# Altium PCB PCB.PcbDoc
Units mil, origin at the board's own origin, x right, y up, seen from the top; angles counter-clockwise.
Board outline 11290 x 5470 mil, 2 copper layers (Top Layer, Bottom Layer); 60 components, 74 nets, 174 pads, 0 vias.
Unrouted connection lines stored in the file: 63.
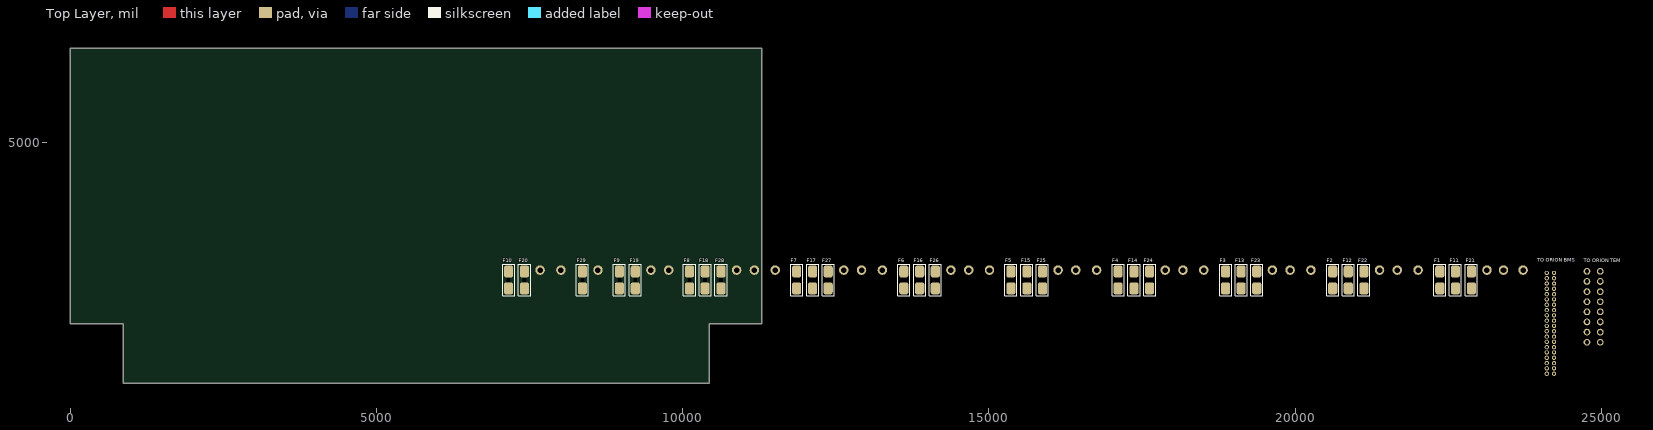
[diagram p0: Top Layer view]
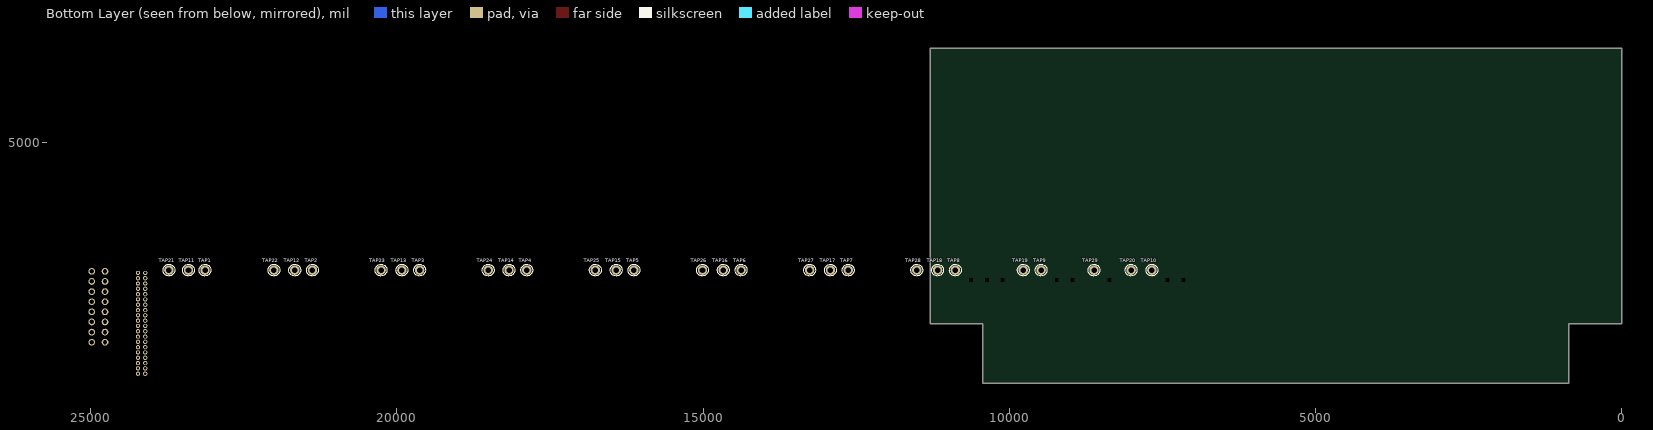
[diagram p1: Bottom Layer view, seen from below]

## Layer stack, top to bottom
Top Solder: solder mask 0.4, Solder Resist, Dk 3.5
Top Layer: signal copper 1.4
Dielectric 1: dielectric 12.6, FR-4, Dk 4.8
Bottom Layer: signal copper 1.4
Bottom Solder: solder mask 0.4, Solder Resist, Dk 3.5

## Board outline
0,2035 860,2035 860,1060 10430,1060 10430,2035 11290,2035 11290,6530 0,6530

## Design rules (kind name [scope] priority, off if disabled: settings)
Clearance [All] p1: gap=10 ignorepadtopadclearanceinfootprint=FALSE except(0: Arc-Hole Track-Hole SMDPad-Hole THPad-Hole Via-Hole Fill-Hole Poly-Hole Region-Hole Text-Hole)
PolygonConnect [All] p1: connectstyle=Relief reliefconductorwidth=10 reliefentries=4 polygonreliefangle="90 Angle" airgapwidth=10
RoutingVias [All] p1: holewidth=28 width=50 viastyle="Through Hole" minholewidth=28 minwidth=50 maxholewidth=28 maxwidth=50
SolderMaskExpansion [All] p1: expansion=4
Width [All] p1: maxlimit=10 minlimit=10 preferedwidth=10
30 further rules are at their usual default settings.

## Components (designator, comment, footprint, x,y, rotation, side; value= is the part's Value field where it differs from the comment)
F1 "0154.750DR" "Omni BLOK 0154" 22365,2750 r90 top
F2 "0154.750DR" "Omni BLOK 0154" 20615,2750 r90 top
F3 "0154.750DR" "Omni BLOK 0154" 18865,2750 r90 top
F4 "0154.750DR" "Omni BLOK 0154" 17110,2750 r90 top
F5 "0154.750DR" "Omni BLOK 0154" 15360,2750 r90 top
F6 "0154.750DR" "Omni BLOK 0154" 13610,2750 r90 top
F7 "0154.750DR" "Omni BLOK 0154" 11860,2750 r90 top
F8 "0154.750DR" "Omni BLOK 0154" 10110,2750 r90 top
F9 "0154.750DR" "Omni BLOK 0154" 8965,2750 r90 top
F10 "0154.750DR" "Omni BLOK 0154" 7155,2750 r90 top
F11 "0154.750DR" "Omni BLOK 0154" 22620,2750 r90 top
F12 "0154.750DR" "Omni BLOK 0154" 20870,2750 r90 top
F13 "0154.750DR" "Omni BLOK 0154" 19120,2750 r90 top
F14 "0154.750DR" "Omni BLOK 0154" 17370,2750 r90 top
F15 "0154.750DR" "Omni BLOK 0154" 15620,2750 r90 top
F16 "0154.750DR" "Omni BLOK 0154" 13870,2750 r90 top
F17 "0154.750DR" "Omni BLOK 0154" 12120,2750 r90 top
F18 "0154.750DR" "Omni BLOK 0154" 10365,2750 r90 top
F19 "0154.750DR" "Omni BLOK 0154" 9225,2750 r90 top
F20 "0154.750DR" "Omni BLOK 0154" 7415,2750 r90 top
F21 "0154.750DR" "Omni BLOK 0154" 22880,2750 r90 top
F22 "0154.750DR" "Omni BLOK 0154" 21125,2750 r90 top
F23 "0154.750DR" "Omni BLOK 0154" 19375,2750 r90 top
F24 "0154.750DR" "Omni BLOK 0154" 17625,2750 r90 top
F25 "0154.750DR" "Omni BLOK 0154" 15875,2750 r90 top
F26 "0154.750DR" "Omni BLOK 0154" 14125,2750 r90 top
F27 "0154.750DR" "Omni BLOK 0154" 12375,2750 r90 top
F28 "0154.750DR" "Omni BLOK 0154" 10625,2750 r90 top
F29 "0154.750DR" "Omni BLOK 0154" 8360,2750 r90 top
TAP1 "0850-0-15-20-83-14-11-0" 0850-0-15-20-83-14-11-0 23135,2910 r180 bottom
TAP2 "0850-0-15-20-83-14-11-0" 0850-0-15-20-83-14-11-0 21380,2910 r180 bottom
TAP3 "0850-0-15-20-83-14-11-0" 0850-0-15-20-83-14-11-0 19630,2910 r180 bottom
TAP4 "0850-0-15-20-83-14-11-0" 0850-0-15-20-83-14-11-0 17880,2910 r180 bottom
TAP5 "0850-0-15-20-83-14-11-0" 0850-0-15-20-83-14-11-0 16130,2910 r180 bottom
TAP6 "0850-0-15-20-83-14-11-0" 0850-0-15-20-83-14-11-0 14380,2910 r180 bottom
TAP7 "0850-0-15-20-83-14-11-0" 0850-0-15-20-83-14-11-0 12630,2910 r180 bottom
TAP8 "0850-0-15-20-83-14-11-0" 0850-0-15-20-83-14-11-0 10880,2910 r180 bottom
TAP9 "0850-0-15-20-83-14-11-0" 0850-0-15-20-83-14-11-0 9480,2910 r180 bottom
TAP10 "0850-0-15-20-83-14-11-0" 0850-0-15-20-83-14-11-0 7670,2910 r180 bottom
TAP11 "0850-0-15-20-83-14-11-0" 0850-0-15-20-83-14-11-0 23405,2910 r180 bottom
TAP12 "0850-0-15-20-83-14-11-0" 0850-0-15-20-83-14-11-0 21670,2910 r180 bottom
TAP13 "0850-0-15-20-83-14-11-0" 0850-0-15-20-83-14-11-0 19920,2910 r180 bottom
TAP14 "0850-0-15-20-83-14-11-0" 0850-0-15-20-83-14-11-0 18170,2910 r180 bottom
TAP15 "0850-0-15-20-83-14-11-0" 0850-0-15-20-83-14-11-0 16420,2910 r180 bottom
TAP16 "0850-0-15-20-83-14-11-0" 0850-0-15-20-83-14-11-0 14670,2910 r180 bottom
TAP17 "0850-0-15-20-83-14-11-0" 0850-0-15-20-83-14-11-0 12920,2910 r180 bottom
TAP18 "0850-0-15-20-83-14-11-0" 0850-0-15-20-83-14-11-0 11170,2910 r180 bottom
TAP19 "0850-0-15-20-83-14-11-0" 0850-0-15-20-83-14-11-0 9770,2910 r180 bottom
TAP20 "0850-0-15-20-83-14-11-0" 0850-0-15-20-83-14-11-0 8010,2910 r180 bottom
TAP21 "0850-0-15-20-83-14-11-0" 0850-0-15-20-83-14-11-0 23725,2910 r180 bottom
TAP22 "0850-0-15-20-83-14-11-0" 0850-0-15-20-83-14-11-0 22010,2910 r180 bottom
TAP23 "0850-0-15-20-83-14-11-0" 0850-0-15-20-83-14-11-0 20260,2910 r180 bottom
TAP24 "0850-0-15-20-83-14-11-0" 0850-0-15-20-83-14-11-0 18510,2910 r180 bottom
TAP25 "0850-0-15-20-83-14-11-0" 0850-0-15-20-83-14-11-0 16760,2910 r180 bottom
TAP26 "0850-0-15-20-83-14-11-0" 0850-0-15-20-83-14-11-0 15010,2910 r180 bottom
TAP27 "0850-0-15-20-83-14-11-0" 0850-0-15-20-83-14-11-0 13260,2910 r180 bottom
TAP28 "0850-0-15-20-83-14-11-0" 0850-0-15-20-83-14-11-0 11510,2910 r180 bottom
TAP29 "0850-0-15-20-83-14-11-0" 0850-0-15-20-83-14-11-0 8615,2910 r180 bottom
"TO ORION BMS" "1376113-6" 1376113-6 24230,2085 r90 top
"TO ORION TEM" "39300160" 39300160 24985,2890 r90 top

## Footprints (in the part's own frame and the unit in brackets; to place one, negate y for a bottom-side part, rotate by r counter-clockwise, add the part's x,y. Pads: shape width x height; smd on the part's side, far side on the other; paste and mask are expansions set on the pad)
0850-0-15-20-83-14-11-0 [mil]
  round 155 hole 90: 1(0,0)
  silkscreen extent -96,-96 96,96, body extent -77,-76 76,76, height 237
1376113-6 [mil]
  round 70 hole 40: 6(-866.14,118.11) 7(-779.53,118.11) 8(-692.91,118.11) 9(-606.3,118.11) 10(-519.68,118.11) 11(-433.07,118.11) 12(-346.46,118.11) 13(-259.84,118.11) 14(-173.23,118.11) 15(-86.61,118.11) 16(0,118.11) 17(86.61,118.11) 18(173.23,118.11) 19(259.84,118.11) 20(346.46,118.11) 21(433.07,118.11) 22(519.68,118.11) 23(606.3,118.11) 24(692.91,118.11) 25(779.53,118.11) 26(779.53,0) 27(692.91,0) 28(606.3,0) 29(519.68,0) 30(433.07,0) 31(346.46,0) 32(259.84,0) 33(173.23,0) 34(86.61,0) 35(0,0) 36(-86.61,0) 37(-173.23,0) 38(-259.84,0) 39(-346.46,0) 40(-433.07,0) 41(-519.68,0) 42(-606.3,0) 43(-692.91,0) 44(-779.53,0) 45(-866.14,0)
  body extent -1015,-321 930,281, height 787
39300160 [mm]
  round 2.8 hole 1.85: 1(0,0) 2(0,5.5) 3(-4.2,0) 4(-4.2,5.5) 5(-8.4,0) 6(-8.4,5.5) 7(-12.6,0) 8(-12.6,5.5) 9(-16.8,0) 10(-16.8,5.5) 11(-21,0) 12(-21,5.5) 13(-25.2,0) 14(-25.2,5.5) 15(-29.4,0) 16(-29.4,5.5)
  round 1.524 hole 3.05: ""(-29.4,-7.3) ""(0,-7.3)
  body extent -32.1,-13.9 3.1,6.03, height 11.4
"Omni BLOK 0154" [mm]
  rrect50% 5x3.81 smd: 1(3.5,0) 2(-3.5,0)
  rect 0x0 hole 1.4 square unplated: 3(0,0)
  silkscreen extent -6.5,-2.5 6.5,2.5, body extent -4.93,-2.52 4.9,2.51, height 3.81

## Part data
F1 F2 F3 F4 F5 F6 F7 F8 F9 F10 F11 F12 F13 F14 F15 F16 F17 F18 F19 F20 F21 F22 F23 F24 F25 F26 F27 F28 F29: "FUSE BOARD MNT 750MA 125VAC/VDC", Digikey Part Number=F1221CT-ND, Manufacturer="LittelFuse Inc", Digikey Link=https://www.digikey.com/product-detail/en/littelfuse-inc/0154.750DR/F1221CT-ND/183370, Part Number=0154.750DR
TAP1 TAP2 TAP3 TAP4 TAP5 TAP6 TAP7 TAP8 TAP9 TAP10 TAP11 TAP12 TAP13 TAP14 TAP15 TAP16 TAP17 TAP18 TAP19 TAP20 TAP21 TAP22 TAP23 TAP24 TAP25 TAP26 TAP27 TAP28 TAP29: Digikey Part Number=ED90436-ND, Angle=90, Contact=Gold, Digikey Link=https://www.digikey.com.au/products/en?keywords=0850-0-15-20-83-14-11-0, Flange=NA, Part Number=0850-0-15-20-83-14-11-0, Pitch=NA, Positions=1, Row Spacing=NA
"TO ORION BMS": Digikey Part Number=A122206-ND, Angle=0, Contact=gold, Digikey Link=https://www.digikey.com.au/product-detail/en/te-connectivity-amp-connectors/1376113-2/A122206-ND/2273530, Part Number=1376113-6, Pitch=2.2, Positions=40, Row Spacing=3
"TO ORION TEM": Digikey Part Number=WM21358-ND, Angle=90, Contact=Tin, Flange=No, Part Number=39300160, Pitch=4.2mm, Positions=16, Row Spacing=5.5mm

## Nets (pads, with @x,y where several pads share a name; then routed paths per layer and width w, separated by ;. In a path a pad name is that pad's centre, name@x,y a point inside that pad or via, vN(x,y) a via of type N, cw(c..) or ccw(c..) an arc to the next point about the centre after c; other vN are vias at no path point)
1: F1.2
2: F2.2
3: F3.2
4: F4.2
5: F5.2
6: "TO ORION BMS.6" F6.2
7: "TO ORION BMS.7" F7.2
8: "TO ORION BMS.8" F8.2
9: "TO ORION BMS.9" F9.2
10: "TO ORION BMS.10" F10.2
11: "TO ORION BMS.11" "TO ORION BMS.12" "TO ORION BMS.13" "TO ORION BMS.14" F11.2
12: "TO ORION BMS.15" F12.2
13: "TO ORION BMS.16" F13.2
14: "TO ORION BMS.17" F14.2
15: "TO ORION BMS.18" F15.2
16: "TO ORION BMS.19" F16.2
17: "TO ORION BMS.20" F17.2
18: "TO ORION BMS.21" F18.2
19: "TO ORION BMS.22" F19.2
20: "TO ORION BMS.23" F20.2
21: "TO ORION BMS.24" "TO ORION BMS.25" "TO ORION BMS.26" "TO ORION BMS.28" F21.2
22: "TO ORION BMS.29" F22.2
23: "TO ORION BMS.30" F23.2
24: "TO ORION BMS.31" F24.2
25: "TO ORION BMS.32" F25.2
26: "TO ORION BMS.33" F26.2
27: "TO ORION BMS.34" F27.2
28: "TO ORION BMS.35" F28.2
29: "TO ORION BMS.36" "TO ORION BMS.37" "TO ORION BMS.38" "TO ORION BMS.39" "TO ORION BMS.40" F29.2
NetF1_1: F1.1 TAP1.1
NetF2_1: F2.1 TAP2.1
NetF3_1: F3.1 TAP3.1
NetF4_1: F4.1 TAP4.1
NetF5_1: F5.1 TAP5.1
NetF6_1: F6.1 TAP6.1
NetF7_1: F7.1 TAP7.1
NetF8_1: F8.1 TAP8.1
NetF9_1: F9.1 TAP9.1
NetF10_1: F10.1 TAP10.1
NetF11_1: F11.1 TAP11.1
NetF12_1: F12.1 TAP12.1
NetF13_1: F13.1 TAP13.1
NetF14_1: F14.1 TAP14.1
NetF15_1: F15.1 TAP15.1
NetF16_1: F16.1 TAP16.1
NetF17_1: F17.1 TAP17.1
NetF18_1: F18.1 TAP18.1
NetF19_1: F19.1 TAP19.1
NetF20_1: F20.1 TAP20.1
NetF21_1: F21.1 TAP21.1
NetF22_1: F22.1 TAP22.1
NetF23_1: F23.1 TAP23.1
NetF24_1: F24.1 TAP24.1
NetF25_1: F25.1 TAP25.1
NetF26_1: F26.1 TAP26.1
NetF27_1: F27.1 TAP27.1
NetF28_1: F28.1 TAP28.1
NetF29_1: F29.1 TAP29.1
TEMP+1: "TO ORION TEM.2"
TEMP+2: "TO ORION TEM.4"
TEMP+3: "TO ORION TEM.6"
TEMP+4: "TO ORION TEM.8"
TEMP+5: "TO ORION TEM.10"
TEMP+6: "TO ORION TEM.12"
TEMP+7: "TO ORION TEM.14"
TEMP+8: "TO ORION TEM.16"
TEMP-1: "TO ORION TEM.1"
TEMP-2: "TO ORION TEM.3"
TEMP-3: "TO ORION TEM.5"
TEMP-4: "TO ORION TEM.7"
TEMP-5: "TO ORION TEM.9"
TEMP-6: "TO ORION TEM.11"
TEMP-7: "TO ORION TEM.13"
TEMP-8: "TO ORION TEM.15"
pads on no net: "TO ORION BMS.27" "TO ORION BMS.41" "TO ORION BMS.42" "TO ORION BMS.43" "TO ORION BMS.44" "TO ORION BMS.45" "TO ORION TEM." F1.3 F2.3 F3.3 F4.3 F5.3 F6.3 F7.3 F8.3 F9.3 F10.3 F11.3 F12.3 F13.3 F14.3 F15.3 F16.3 F17.3 F18.3 F19.3 F20.3 F21.3 F22.3 F23.3 F24.3 F25.3 F26.3 F27.3 F28.3 F29.3

## Silkscreen, mask and mechanical layers (free items; w line width, h text height)
Mechanical 1:
  lines w47.24: 976.38,5000 cw(c1000,5000) 1000,5023.62 ccw(c1000,5000) 976.38,5000 ; 7000,976.38 ccw(c7000,1000) 7023.62,1000 cw(c7000,1000) 7000,976.38